# EAGLE board 1u_panel_bkup (EAGLE 7.5.0)
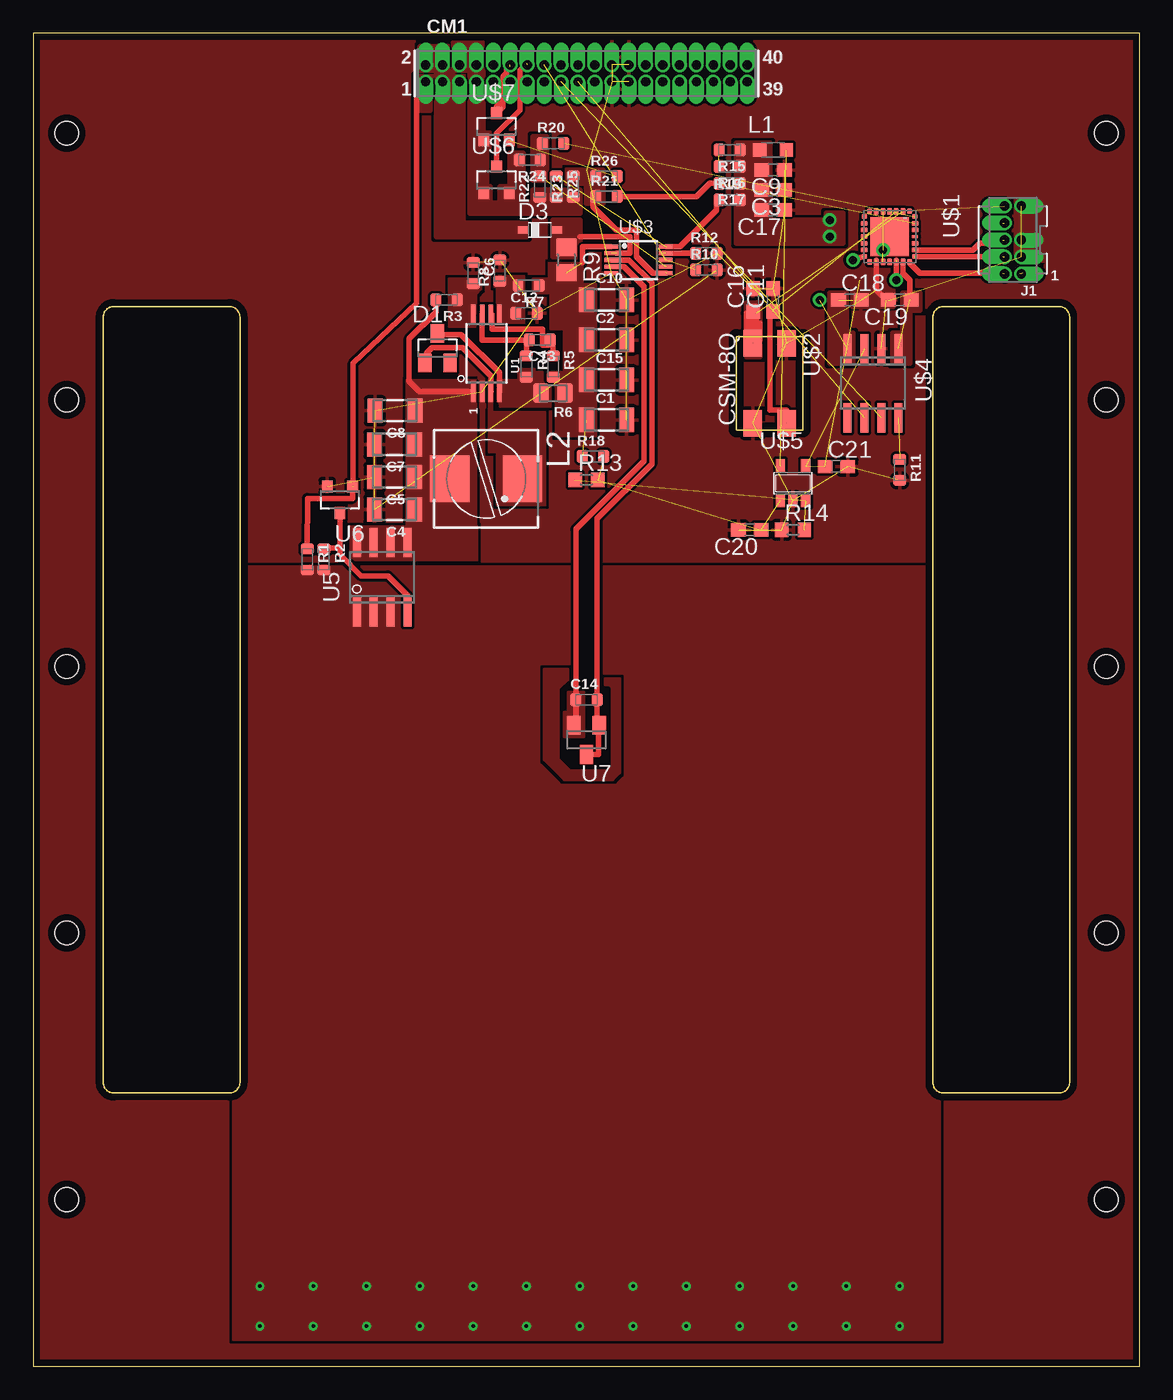
[diagram p0: board, top side]
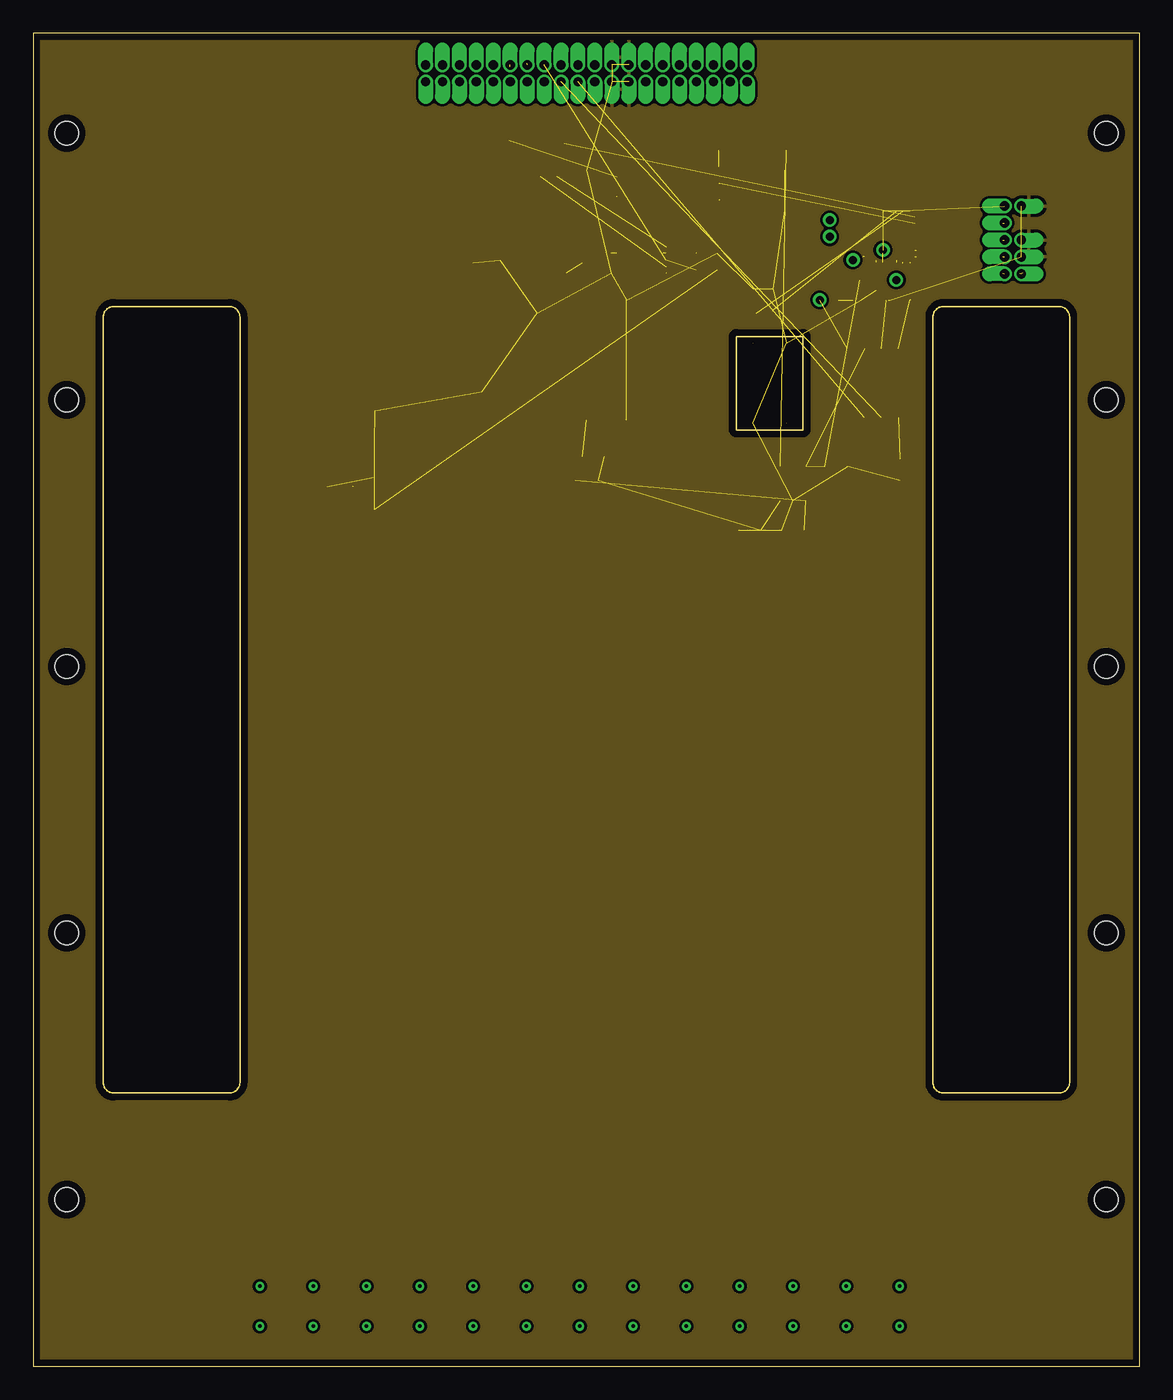
[diagram p1: board, inner layer Route2]
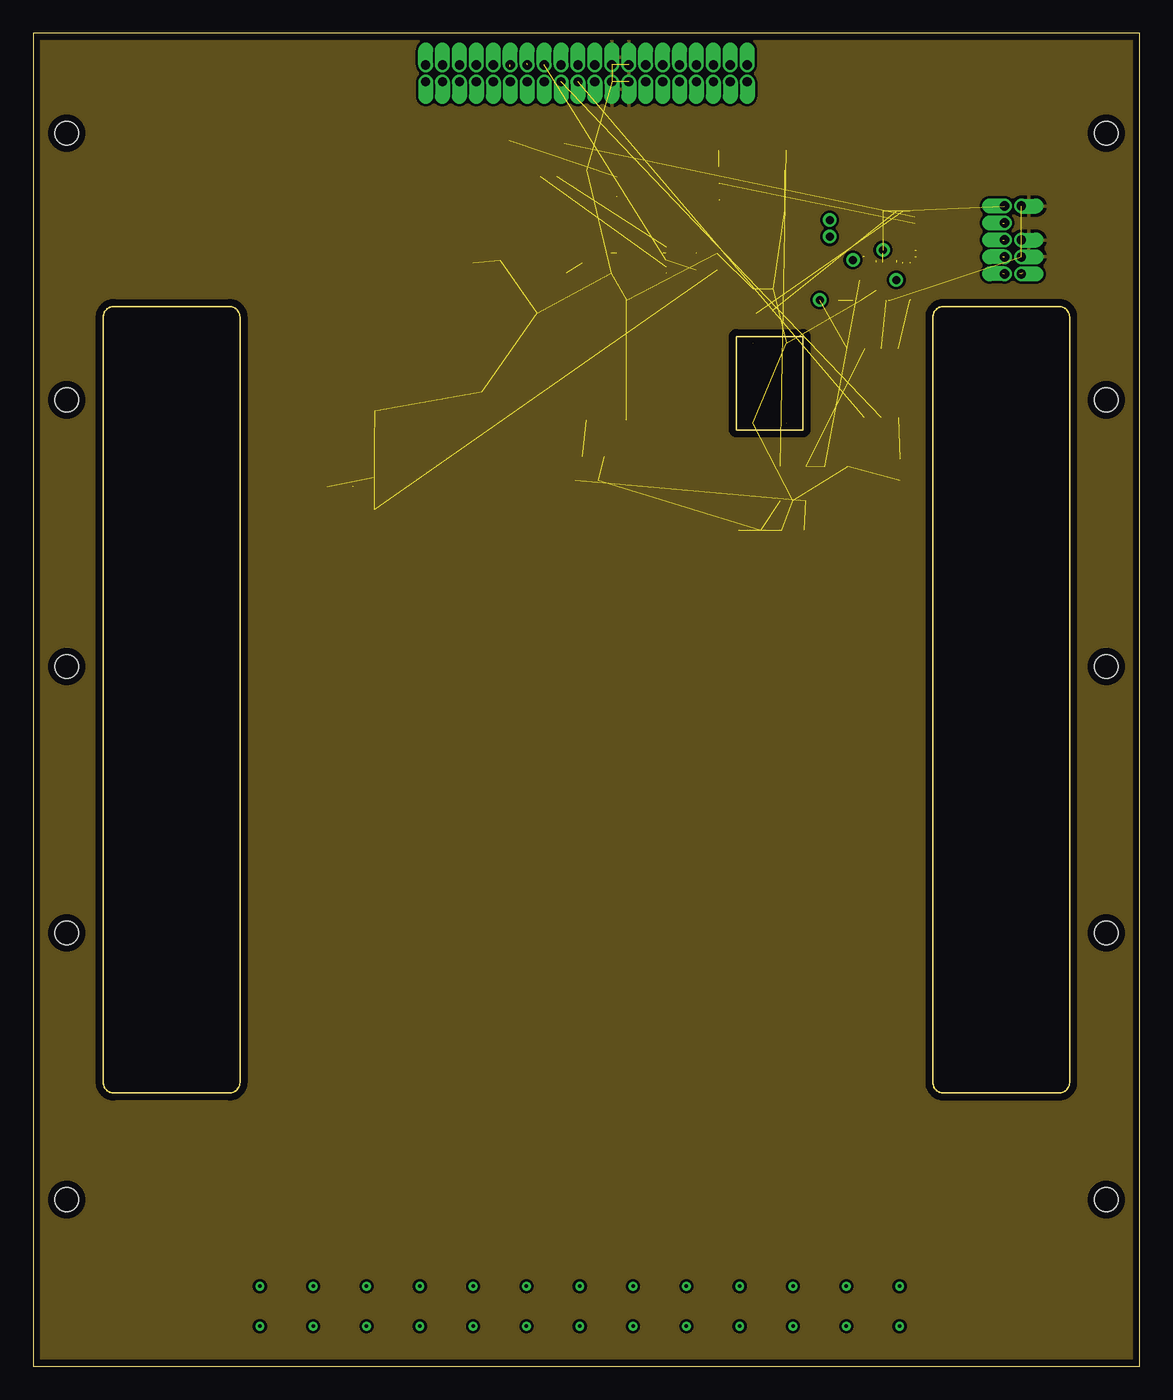
[diagram p2: board, inner layer Route15]
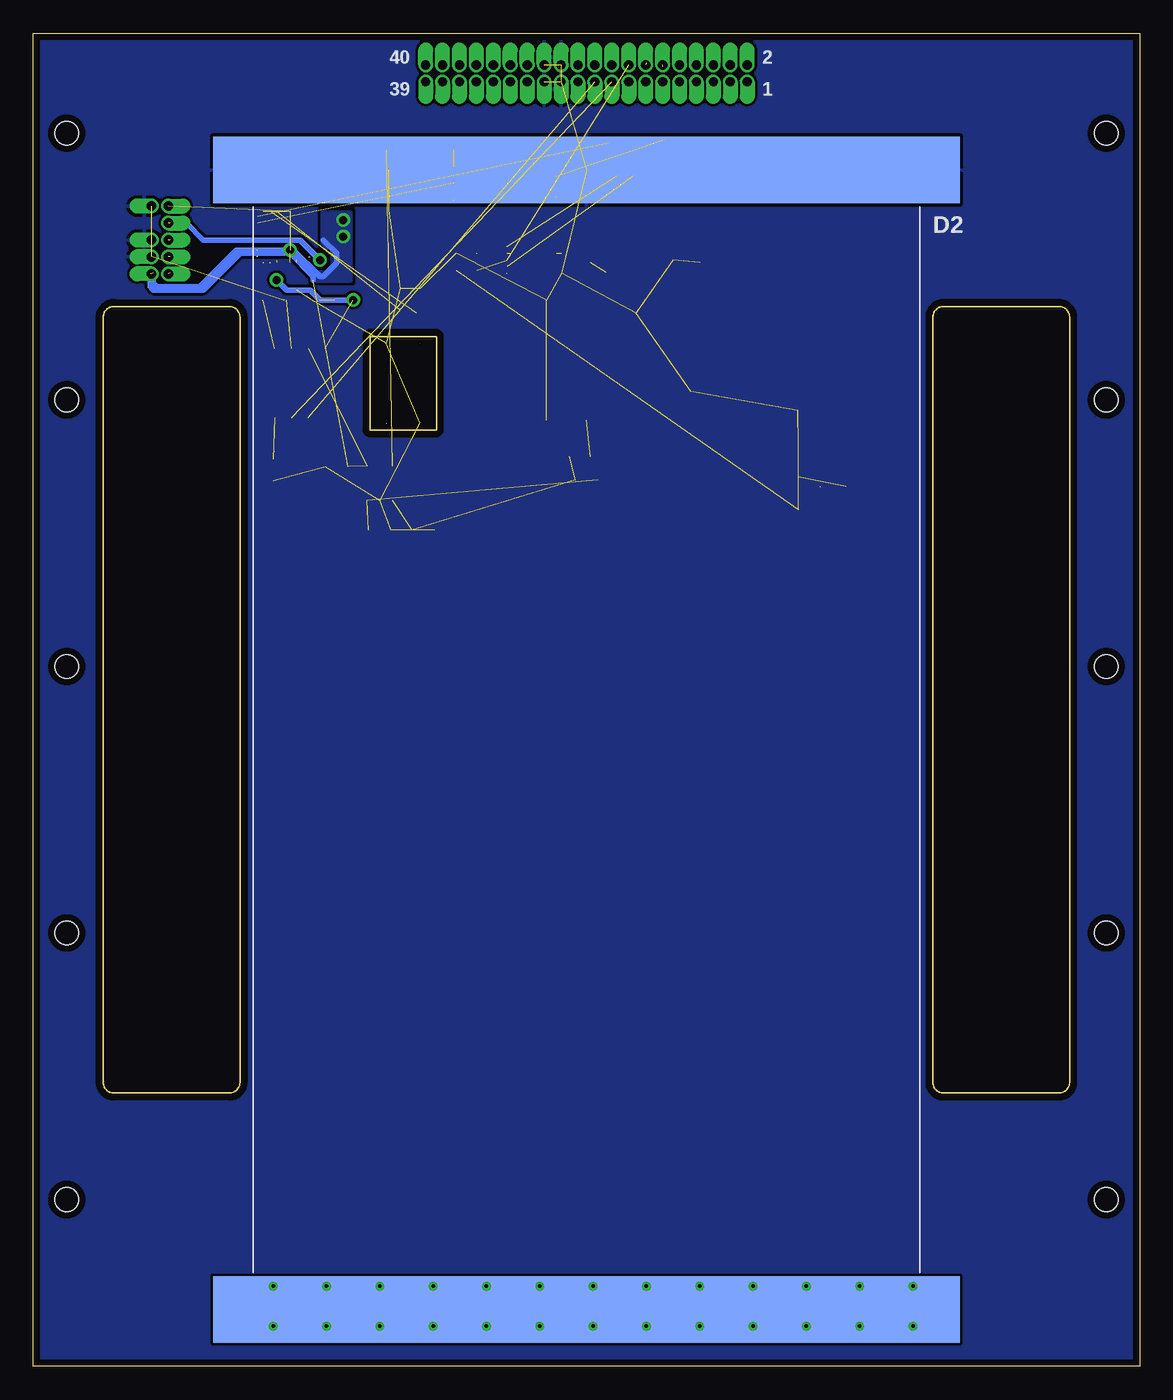
[diagram p3: board, bottom side, seen from below]

Size 83 x 100 mm. Coordinates in mm from the lower left corner, seen from the top.
Outline: 0,0 83,0 83,100 0,100 0,0
Outline: 14.73,20.5 6.02,20.5 arc-90 5.25,21.27 5.25,78.73 arc-90 6.02,79.5 14.73,79.5 arc-90 15.5,78.73 15.5,21.27 arc-90 14.73,20.5
Outline: 68.27,20.5 76.98,20.5 arc90 77.75,21.27 77.75,78.73 arc90 76.98,79.5 68.27,79.5 arc90 67.5,78.73 67.5,21.27 arc90 68.27,20.5
Copper layers (1+2*15+16): Top 0.0178mm / dielectric 12mil / Route2 0.0356mm / dielectric 28mil / Route15 0.0356mm / dielectric 12mil / Bottom 0.0178mm
Design rules "psas-4Lyr_v1.0.0.3": minimum track width 6mil, minimum drill 10mil, track to track 6mil, track to pad 6mil, pad to pad 6mil, via to via 6mil, smd to smd 6mil, copper to edge 20mil, drill to drill 16mil, minimum pad ring 8mil, minimum via ring 8mil, stop-mask expansion 3mil, vias tented up to drill 11mil, thermal gap 10mil
Holes 1.78 mm at 2.5,12.5 2.5,32.5 2.5,52.5 2.5,72.5 2.5,92.5 80.5,12.5 80.5,32.5 80.5,52.5 80.5,72.5 80.5,92.5

## Footprints (pad centres in the part's own frame; a part is rotated, then mirrored left to right if it is on the bottom)
1206-B = smd 1.15 x 1.8: 1 -1.5,0; 2 1.5,0
C0603 = smd 1.1 x 1: 1 -0.85,0; 2 0.85,0
.0603-B-NOSILK = smd 0.8 x 0.95: 1 -0.8,0; 2 0.8,0
HARWIN-ARCHER-M50-3502042 = drill 0.7 pad 1.07 offset: P$1 -12.065,-0.635; P$2 -12.065,0.635; P$3 -10.795,-0.635; P$4 -10.795,0.635; P$5 -9.525,-0.635; P$6 -9.525,0.635; P$7 -8.255,-0.635; P$8 -8.255,0.635; P$9 -6.985,-0.635; P$10 -6.985,0.635; P$11 -5.715,-0.635; P$12 -5.715,0.635; P$13 -4.445,-0.635; P$14 -4.445,0.635; P$15 -3.175,-0.635; P$16 -3.175,0.635; P$17 -1.905,-0.635; P$18 -1.905,0.635; P$19 -0.635,-0.635; P$20 -0.635,0.635; P$21 0.635,-0.635; P$22 0.635,0.635; P$23 1.905,-0.635; P$24 1.905,0.635; P$25 3.175,-0.635; P$26 3.175,0.635; P$27 4.445,-0.635; P$28 4.445,0.635; P$29 5.715,-0.635; P$30 5.715,0.635; P$31 6.985,-0.635; P$32 6.985,0.635; P$33 8.255,-0.635; P$34 8.255,0.635; P$35 9.525,-0.635; P$36 9.525,0.635; P$37 10.795,-0.635; P$38 10.795,0.635; P$39 12.065,-0.635; P$40 12.065,0.635
SOT23 = smd 1 x 1.4: 1 -0.95,-1.1; 2 0.95,-1.1; 3 0,1.1
ALTA-FIVE-CELL = smd 56 x 5: NEG 0,42.75; POS 0,-42.75
SOD323_ST = smd 0.8 x 0.6: A 1.25,0; C -1.25,0
1.27MM_2X5 = drill 0.7 pad 1.016 offset: !RESET 0.635,-2.54; GND -0.635,1.27; GND@2 -0.635,0; GNDDET -0.635,-2.54; NC 0.635,-1.27; SWDCLK 0.635,1.27; SWDIO 0.635,2.54; SWO 0.635,0; VTREF -0.635,2.54
L2012C = smd 1 x 1: 1 -1,0; 2 1,0
PIS2816 = smd 3.5 x 2.95: 1 0,2.725; 2 0,-2.725
.0805-B-NOSILK = smd 1.15 x 1.45: 1 -0.9,0; 2 0.9,0
R0805 = smd 1.3 x 1.5: 1 -0.95,0; 2 0.95,0
R0603 = smd 1 x 1.1: 1 -0.85,0; 2 0.85,0
TSSOP-8 = smd 1.56 x 0.41: 1 -2.88,0.975; 2 -2.88,0.325; 3 -2.88,-0.325; 4 -2.88,-0.975; 5 2.88,-0.975; 6 2.88,-0.325; 7 2.88,0.325; 8 2.88,0.975
SO8 = smd 0.6 x 2.2: 1 -1.905,-2.6; 2 -0.635,-2.6; 3 0.635,-2.6; 4 1.905,-2.6; 5 1.905,2.6; 6 0.635,2.6; 7 -0.635,2.6; 8 -1.905,2.6
SOT23' = smd 0.8 x 0.9: 1 -0.95,-1; 2 0.95,-1; 3 0,1
UFQFPN-28 = smd 0.4 x 0.35: 1 -1.9,1.5; 7 -1.9,-1.5; 15 1.9,-1.5; 21 1.9,1.5 | smd 0.5 x 0.35: 2 -1.9,1; 3 -1.9,0.5; 4 -1.9,0; 5 -1.9,-0.5; 6 -1.9,-1; 16 1.9,-1; 17 1.9,-0.5; 18 1.9,0; 19 1.9,0.5; 20 1.9,1 | smd 0.35 x 0.4: 8 -1.5,-1.9; 14 1.5,-1.9; 22 1.5,1.9; 28 -1.5,1.9 | smd 0.35 x 0.5: 9 -1,-1.9; 10 -0.5,-1.9; 11 0,-1.9; 12 0.5,-1.9; 13 1,-1.9; 23 1,1.9; 24 0.5,1.9; 26 -0.5,1.9; 27 -1,1.9 | smd 0.25 x 0.5: 25 0,1.9 | smd 2.9 x 2.9: TH 0,0
4-SMD = smd 2 x 1.4: 1 -3,-1.27; 2 3,-1.27; 3 3,1.27; 4 -3,1.27
MSOP10 = smd 0.3 x 1: 1 -1,-2.05; 2 -0.5,-2.05; 3 0,-2.05; 4 0.5,-2.05; 5 1,-2.05; 6 1,2.05; 7 0.5,2.05; 8 0,2.05; 9 -0.5,2.05; 10 -1,2.05
SO-08 = smd 0.6 x 2.2: 1 -1.905,-2.6; 2 -0.635,-2.6; 3 0.635,-2.6; 4 1.905,-2.6; 5 1.905,2.6; 6 0.635,2.6; 7 -0.635,2.6; 8 -1.905,2.6
SOT23-5 = smd 0.69 x 0.99: 1 -0.95,-1.29; 2 0,-1.29; 3 0.95,-1.29; 4 0.95,1.3; 5 -0.95,1.3

## Placement (x,y rotation side)
C1  NP  [1206-B]  43,71 0 top
C2  NP  [1206-B]  43,77 0 top
C3  [C0603]  55.5,88.25 180 top
C4  NP  [1206-B]  27.11,64.27 180 top
C5  NP  [1206-B]  27.11,66.7 180 top
C6  .1u  [.0603-B-NOSILK]  33,82 270 top
C7  NP  [1206-B]  27.11,69.16 180 top
C8  47u  [1206-B]  27.14,71.69 180 top
C9  [C0603]  55.5,89.75 180 top
C10  NP  [1206-B]  43,80 0 top
C11  [C0603]  55.5,80 90 top
C12  .1u  [.0603-B-NOSILK]  37,79 0 top
C13  .1u  [.0603-B-NOSILK]  38,77 180 top
C14  20u  [.0603-B-NOSILK]  41.5,50 0 top
C15  47u  [1206-B]  43,74 0 top
C16  [C0603]  54,80 90 top
C17  [C0603]  55.5,86.75 180 top
C18  [C0603]  61.25,80 0 top
C19  [C0603]  65,80 180 top
C20  4.7u  [C0603]  53.75,62.75 180 top
C21  4.7u  [C0603]  60.25,67.5 0 top
CM1  ORESAT-BACKPLANE-40PIN  [HARWIN-ARCHER-M50-3502042]  41.5,97 0 top
D1  BAS70  [SOT23]  30.32,76.38 0 top
D2  ALTA-5-CELL-ARRAY  [ALTA-FIVE-CELL]  41.5,47 0 bottom
D3  BAT60J  [SOD323_ST]  38,85.25 0 top
J1  1.27MM-SWD-CONNECTOR  [1.27MM_2X5]  73.5,84.5 180 top
L1  10u  [L2012C]  55.5,91.25 0 top
L2  [PIS2816]  33.98,66.57 270 top
R1  10k  [.0603-B-NOSILK]  20.55,60.53 270 top
R2  100k  [.0603-B-NOSILK]  21.79,60.53 270 top
R3  1k  [.0603-B-NOSILK]  31,80 180 top
R4  [.0603-B-NOSILK]  37,75 270 top
R5  [.0603-B-NOSILK]  39,75 270 top
R6  [.0805-B-NOSILK]  39,73 180 top
R7  [.0603-B-NOSILK]  37.17,81.07 180 top
R8  [.0603-B-NOSILK]  35,82.2 90 top
R9  [R0805]  40,83 270 top
R10  [.0603-B-NOSILK]  50.5,82.25 0 top
R11  0  [.0603-B-NOSILK]  65,67.25 270 top
R12  [.0603-B-NOSILK]  50.5,83.5 0 top
R13  10k  [R0603]  41.5,66.5 0 top
R14  10k  [R0603]  57,62.75 0 top
R15  [.0603-B-NOSILK]  52.25,91.25 180 top
R16  5.6k  [.0603-B-NOSILK]  52.25,90 180 top
R17  5.6k  [.0603-B-NOSILK]  52.25,88.75 180 top
R18  NP  [.0603-B-NOSILK]  42,68.25 0 top
R19  NP  [.0603-B-NOSILK]  52.25,87.5 0 top
R20  NP  [.0603-B-NOSILK]  39,91.75 0 top
R21  NP  [.0603-B-NOSILK]  43,87.75 0 top
R22  NP  [.0603-B-NOSILK]  38,88.5 90 top
R23  NP  [.0603-B-NOSILK]  40.5,88.5 90 top
R24  NP  [.0603-B-NOSILK]  37.25,90.5 180 top
R25  NP  [.0603-B-NOSILK]  39.25,88.5 270 top
R26  NP  [.0603-B-NOSILK]  43,89.25 0 top
U1  SPV1040  [TSSOP-8]  34,76 90 top
U5  P-CHANNELFET  [SO8]  26.18,59.2 0 top
U6  ON-N-CHANNEL-FET  [SOT23']  23,65 180 top
U7  DIODE-INC-NPN  [SOT23]  41.5,47 180 top
U$1  STM32F042  [UFQFPN-28]  64.25,84.75 270 top
U$2  CSM-8Q  [4-SMD]  55.25,73.75 270 top
U$3  LTC2990  [MSOP10]  45.41,83 270 top
U$4  SN65HVD231  [SO-08]  63,73.75 180 top
U$5  LM3761  [SOT23-5]  57,66.25 0 top
U$6  ON-N-CHANNEL-FET  [SOT23']  34.75,89 0 top
U$7  ON-N-CHANNEL-FET  [SOT23']  34.75,93 0 top

## Library data of the parts
C1 C2 C4-C8 C10 C12-C15 R1-R8 R10-R12 R15-R26 = rcl_custom
C3 C9 C11 C16-C21 L1 R9 R13 R14 = rcl
CM1 = oresat-eagle
D1 D3 = diode
D2 = alta-cell
J1 = con-swd
L2 = inductor-for-spv
U1 = spv1040
U5 = vishay-p-channel-fet
U6 U$6 U$7 = on-n-channel-fet
U7 = diodes-inc-npn
U$1 = STM32F042F6
U$2 = CSM-8Q
U$3 = LTC2990
U$4 = SN65HVD231
U$5 = LM3761

## Nets
3.3V: C3.2 C9.2 C17.2 C21.1 J1.VTREF L1.1 R15.1 R16.1 R17.1 R19.2 U$1.1 U$1.5 U$1.17 U$4.3 U$5.4
ADDRSELECT: CM1.P$16 R10.1 U$3.8
ADR1: R12.1 U$3.9
CANH: CM1.P$17 U$4.7
CANL: CM1.P$19 U$4.6
CRYSTALIN: C16.1 U$1.2 U$2.1
CRYSTALOUT: C11.1 U$1.3 U$2.3
D: C19.1 U$1.20 U$4.1
GND: C1.2 C2.2 C3.1 C4.2 C5.2 C6.1 C7.2 C8.2 C9.1 C10.2 C11.2 C12.2 C15.2 C16.2 C17.1 C18.2 C19.2 C20.2 C21.2 CM1.P$23 CM1.P$24 CM1.P$25 CM1.P$26 D2.NEG J1.GND J1.GND@2 J1.GNDDET R8.2 R10.2 R11.2 R12.2 R14.1 U1.2 U6.2 U$1.16 U$2.2 U$2.4 U$3.5 U$4.2 U$5.2
ICTRL+: C13.2 R4.1 U1.7
ICTRL-: C13.1 R5.1 U1.6
LX: D1.1 L2.1 U1.3
N6: R2.1 U5.4 U6.3
N$2: R11.1 U$4.8
N$3: R15.2 R16.2
N$11: L1.2 U$5.5
N$15: R13.1 R14.2 U$5.3
R: C18.1 U$1.19 U$4.4
RESET: J1.!RESET U$1.4
SCLOPT1: R20.1 R22.2 R24.1 U$3.7
SCLOPT1ON: R24.2 U$6.2
SCLOPT1OUT: CM1.P$14 U$6.3
SCLOPT2: R17.2 R21.2 U$1.27
SDAOPT1: R21.1 R23.2 R26.1 U$3.6
SDAOPT1ON: R26.2 U$7.2
SDAOPT1OUT: CM1.P$12 U$7.3
SDAOPT2: R20.2 U$1.28
SHORT: CM1.P$1 R1.1 U6.1
SOLAR-IN: D2.POS R1.2 R2.2 U5.1 U5.2 U5.3
SOLAR-IN-SWITCHED: C4.1 C5.1 C7.1 C8.1 L2.2 R3.2 U1.1 U5.5 U5.6 U5.7 U5.8
SOLAR-IN-SWITCHED1: C1.1 C2.1 C10.1 C15.1 R5.2 R6.1 R7.1 R9.2 R18.1 U$3.1
SOLAR-IN-SWITCHED2: C20.1 R13.2 R18.2 U$5.1
SWDCLK: J1.SWDCLK U$1.22
SWDIO: J1.SWDIO U$1.21
SWITCHEDOUT: CM1.P$2 CM1.P$3 CM1.P$4 CM1.P$5 D3.C
SWO: J1.SWO U$1.23
TDI: J1.NC U$1.14
V3: C14.2 U7.1 U7.3 U$3.3
V4: C14.1 U7.2 U$3.4
VCCOPT1: R19.1 R25.1 U$3.10
VCCOPT2: CM1.P$6 CM1.P$7 CM1.P$8 R22.1 R23.1 R25.2 U$6.1 U$7.1
VCTRL: C12.1 R7.2 R8.1 U1.5
VOUT: D1.3 R4.2 R6.2 U1.4
VSOLAR: D3.A R9.1 U$3.2
XSHUT: C6.2 R3.1 U1.8

## Tracks (layer width: path | path; a pad name or v marks a point on that pad's centre or on a via)
3.3V  (via drill 0.6)  (8 unrouted)
  Bottom 0.406: 74,82 74,81.25 73.75,81 70.5,81 67.75,83.75 v63.75,83.75 63.5,83.75 61.5,81.75 61.25,81.75 60.25,82.75 60.25,83.5 61.25,84.5 | 74.25,82 74.25,81 74,80.75 70.25,80.75 67.5,83.5 63.75,83.5 62,81.75 62,81.5
  other vias: 59.75,84.75 59.75,86
  pour Top (no thermals): 52.75,91.75 52.75,86.25 55.25,86.25 55.25,91.75
  pour Bottom: 61.25,84.75 59.75,84.75 59.75,86.25 61.25,86.25
  pour Top (no thermals): 52.75,86.25 52.75,84.25 60.75,84.25 60.75,86.5 59.5,86.5 59.5,86 53.25,86 53.25,86.25
  pour Bottom (no thermals): 60,84 61,84 61.25,84.25 61.25,86.5 59.25,86.5 59.25,84
  pour Bottom (no thermals): 59.25,83.75 59.25,81.5 61.75,81.5 61.75,82 60.75,82 60.5,82 60.5,83.75
ADDRSELECT  (2 unrouted)
ADR1  (2 unrouted)
  Top 0.406: 49.75,83.5 47.25,83.5
CANH  (1 unrouted)
CANL  (1 unrouted)
CRYSTALIN  (2 unrouted)
  Top 0.406: 53.75,79 54,79 | 54,79.25 54,79 | 54,79 54,76.75 | 54,79 54.25,79 54.25,76.75 53.75,76.75 53.75,79 | 53.75,79 53.5,79 53.5,77 54.5,77 54.5,78.25
  pour Top (no thermals): 53.5,79.75 53.5,75.75 54.5,75.75 54.5,79.75
CRYSTALOUT  (3 unrouted)
  Top 0.406: 55.5,79.25 55.25,79.25 55.25,71.75 56.5,71.75 56.5,71.25 56.5,70.75
D  (3 unrouted)
  Top 0.406: 65.75,80 65.75,81.5 65.25,82 65.25,82.75
  pour Top (no thermals): 64.5,75.25 65.75,75.25 65.75,79.25 66.5,79.25 66.5,80.5 65.25,80.5 65.25,77.5 64.5,77.5
GND  (40 unrouted)
  Top 0.406: 64.25,80 64,80 63.25,80.75 63.25,83
  pour Bottom (isolate 0.2, rank 6): 0,0 0,100 83,100 83,0
  pour Top (isolate 0.2, rank 6): 0,0 0,100 83,100 83,0
  pour Route2 (isolate 0.2, rank 6): 0,0 0,100 83,100 83,0
  pour Route15 (isolate 0.2, rank 6): 0,0 0,100 83,100 83,0
  pour Top (isolate 0.2, no thermals): 33.4,73.6 33.4,74.4 32.1,74.4 32.1,75.4 32.2,75.4 32.6,75.4 33.9,74.1 33.9,71.9 33.5,71.9 33.5,73.5
  pour Top (isolate 0.2, no thermals): 42.9,51.1 43.2,51.1 43.4,50.9 43.4,45 43.3,44.9 43.1,44.7 40.3,44.7 39.4,45.6 39.4,50.8 40.1,51.5 40.1,52.3 38.3,52.3 38.3,45.6 38.3,45.5 39.8,44 43.5,44 44,44.5 44,51.6 42.9,51.6
  pour Top (no thermals): 73.75,87.75 73.75,83.25 74,83 76,83 76,87.75
  pour Top (no thermals): 61.5,80.5 61.5,79.5 64.5,79.5 64.5,80.75 61.5,80.75
ICTRL+
  Top 0.406: U1.7 33.67,77 C13.2 37,77 R4.1
ICTRL-
  Top 0.406: U1.6 34.4,78.88 34.4,77.8 38.2,77.8 38.2,76.6 38.8,76.6 | 38.8,76.6 C13.1 | 38.8,76.6 39,76.6 R5.1
LX
  Top 0.406: U1.3 34.33,74.28 32.2,76.4 29.9,76.4 29.5,76 29.5,75.41 D1.1
  pour Top (isolate 0.2, no thermals): 34.4,74 34.4,71.6 38.4,71.6 38.4,64.6 34.8,64.6 34.8,68.6 34.2,68.6 34.2,74
N6
  Top 0.406: U6.3 23,61.5 | 23,61.5 22.9,61.4 21.86,61.4 R2.1 | 23,61.5 23,60.9 24.6,59.3 26.6,59.3 28.1,57.8 28.1,56.62 U5.4
N$2  (1 unrouted)
N$3  (1 unrouted)
N$11  (1 unrouted)
N$15  (2 unrouted)
R  (via drill 0.6)  (3 unrouted)
  Top 0.406: v64.75,81.5 64.75,83
  Bottom 0.406: v59,80 61.5,80 62.25,80.75 64,80.75 v64.75,81.5
  pour Top (no thermals): 60.75,75.25 61.5,75.25 61.5,77.5 61,77.5 61,80.5 59.75,80.5 59.75,75.25
RESET  (1 unrouted)
SCLOPT1  (1 unrouted)
  pour Top (no thermals): 37.5,89 38.5,89 38.5,92.25 37.5,92.25
SCLOPT1ON
  pour Top (no thermals): 35.25,87.5 36.75,87.5 36.75,91 36,91 35.75,91 35.75,88.5 35,88.5 35,87.5
SCLOPT1OUT  (1 unrouted)
  Top 0.406: U$6.3 34.75,92.5 36.5,94.25 36.5,97.25 37,97.75
SCLOPT2  (3 unrouted)
  Top 0.406: 51.5,88.75 50.75,88.75 49.75,87.75 43.75,87.75
SDAOPT1  (1 unrouted)
  Top 0.406: 47.5,82 46.5,82 45.25,83.25 45.25,85.25 43.75,85.25 42,87 42,87.5 42.25,87.75
  pour Top (no thermals): 40,89.75 42.75,89.75 42.75,87.25 41.5,87.25 41.5,88.75 40,88.75
SDAOPT1ON  (1 unrouted)
SDAOPT1OUT  (1 unrouted)
  Top 0.406: 35,94.75 34.75,94.5 U$7.3 35.25,94.5 35.25,96.75 35.5,97 35.5,97.25 35.75,97.5
SDAOPT2  (1 unrouted)
SHORT  (1 unrouted)
  Top 0.406: R1.1 20.57,65.1 23.95,65.1 U6.1 | 24,66 24,75.25 28.75,79.75 28.75,95.25
  pour Top (no thermals): 30,96.75 28.75,96.75 28.75,94.25 29.75,94.25 29.75,96.5
SOLAR-IN  (via drill 0.25)
  Bottom 0.2: 42.8,4.25 D2.POS 41,4.25 v41,3 | 62.8,4.25 61,4.25 v61,3
  other vias: 17,6 17,3 21,6 21,3 25,3 25,6 29,6 29,3 33,6 33,3 37,6 37,3 41,6 45,6 45,3 49,6 49,3 53,6 53,3 57,6 57,3 61,6 65,6 65,3
  pour Top (isolate 0.2, rank 3, no thermals): 15,60 68,60 68,2 15,2
SOLAR-IN-SWITCHED
  Top 0.406: U1.1 28.98,73.12 28.2,73.9 28.2,77.1 30.2,79.1 R3.2
  pour Top (isolate 0.2, no thermals): 28,60.5 28,74 33.2,74 33.2,60.5
  pour Top (isolate 0.2, no thermals): 23.8,60.5 33.3,60.5 33.3,63 23.8,63
SOLAR-IN-SWITCHED1  (2 unrouted)
  Top 0.406: U$3.1 41.2,84 41.2,82.8
  pour Top (isolate 0.2, rank 2, no thermals): 42.2,69.8 39.2,69.8 39.2,73.6 38.6,73.6 38.6,74.6 39.8,74.6 39.8,77.8 38.8,77.8 38.8,80.5 37.5,80.5 37.5,81.6 38.7,81.6 38.7,82.9 38.8,83 41.2,83 41.2,81.2 42.2,81.2
SOLAR-IN-SWITCHED2  (3 unrouted)
SWDCLK  (2 unrouted)
  Top 0.406: 72.75,83.25 66.25,83.25
SWDIO  (2 unrouted)
  Top 0.406: 72.75,82 66.5,82 65.75,82.75
SWITCHEDOUT
  pour Top (no thermals): 37,84.75 30.25,84.75 30.25,97 30.25,97.25 29,97.25 29,99 31.25,99 31.25,97 32.25,97 32.25,85.75 37,85.75
SWO  (2 unrouted)
  Top 0.406: 66.25,83.75 70.5,83.75 71,84.25 72.5,84.25 72.75,84.5
TDI  (via drill 0.6)  (2 unrouted)
  Top 0.406: v61.5,83 62.25,83.25
  Bottom 0.406: 72.75,85.75 71.5,85.75 70.25,84.5 63,84.5 v61.5,83
V3
  Top 0.406: U$3.3 44.7,83 46.4,81.3 46.4,67.7 42.3,63.6 C14.2 42.3,48.25 U7.1 42.4,48.05 42.4,45.9 U7.3
V4
  Top 0.406: U$3.4 44.3,82.5 45.8,81 45.8,67.9 40.7,62.8 C14.1 40.7,48.25 U7.2
  pour Top (isolate 0.2, no thermals): 40.1,50.6 40.1,49.1 39.8,49.1 39.8,47.2 41.3,47.2 41.3,50.6
VCC
  pour Top (isolate 0.2, no thermals): 47,84.4 47,83.9 48,83.9 48,84.3 48,84.4
VCCOPT1  (3 unrouted)
  Top 0.406: 47.5,84 48.5,84 51.25,86.75 51.25,87.25 51.5,87.5
VCCOPT2
  pour Top (no thermals): 31.5,99.25 31.5,97.25 32.75,97.25 32.75,87.25 34.25,87.25 34.25,88.5 34,88.5 34,88.75 34,91.5 34.25,91.5 34.25,92.5 34,92.5 33.75,92.5 33.75,99.25
  pour Top (no thermals): 41,88 41,86.5 32.75,86.5 32.75,87.25 37.5,87.25 37.5,88.25 41,88.25
VCTRL
  pour Top (isolate 0.2, no thermals): 34.6,81.8 34.6,81 34.8,81 34.8,78.2 36.6,78.2 36.8,78.2 36.8,81.8
VOUT
  Top 0.406: U1.4 34.98,74.53 32.1,77.4 30.4,77.4 D1.3
  pour Top (isolate 0.2, no thermals): 38.8,72 35,72 34.8,74 36.4,74 36.4,74.8 37.6,74.8 37.6,74.6 38.2,74.6 38.2,73.8 38.8,73.8
VSOLAR  (1 unrouted)
  Top 0.406: 43.75,83.5 44.75,83.5 44.75,84.75 41,84.75
  pour Top (no thermals): 39,84.5 39,86 41,86 41,85.75 41,83.25 39,83.25 39,83.5
XSHUT
  pour Top (isolate 0.2, no thermals): 33.2,78 33.2,80.4 33.6,80.8 33.6,81.6 32.4,81.6 31.2,81.6 31.2,78